# Altium PCB e80m.PcbDoc
Units mm, origin at the board's own origin, x right, y up, seen from the top; angles counter-clockwise.
Board outline 50 x 57 mm, 2 copper layers (Top Layer, Bottom Layer); 17 components, 19 nets, 77 pads, 100 vias.
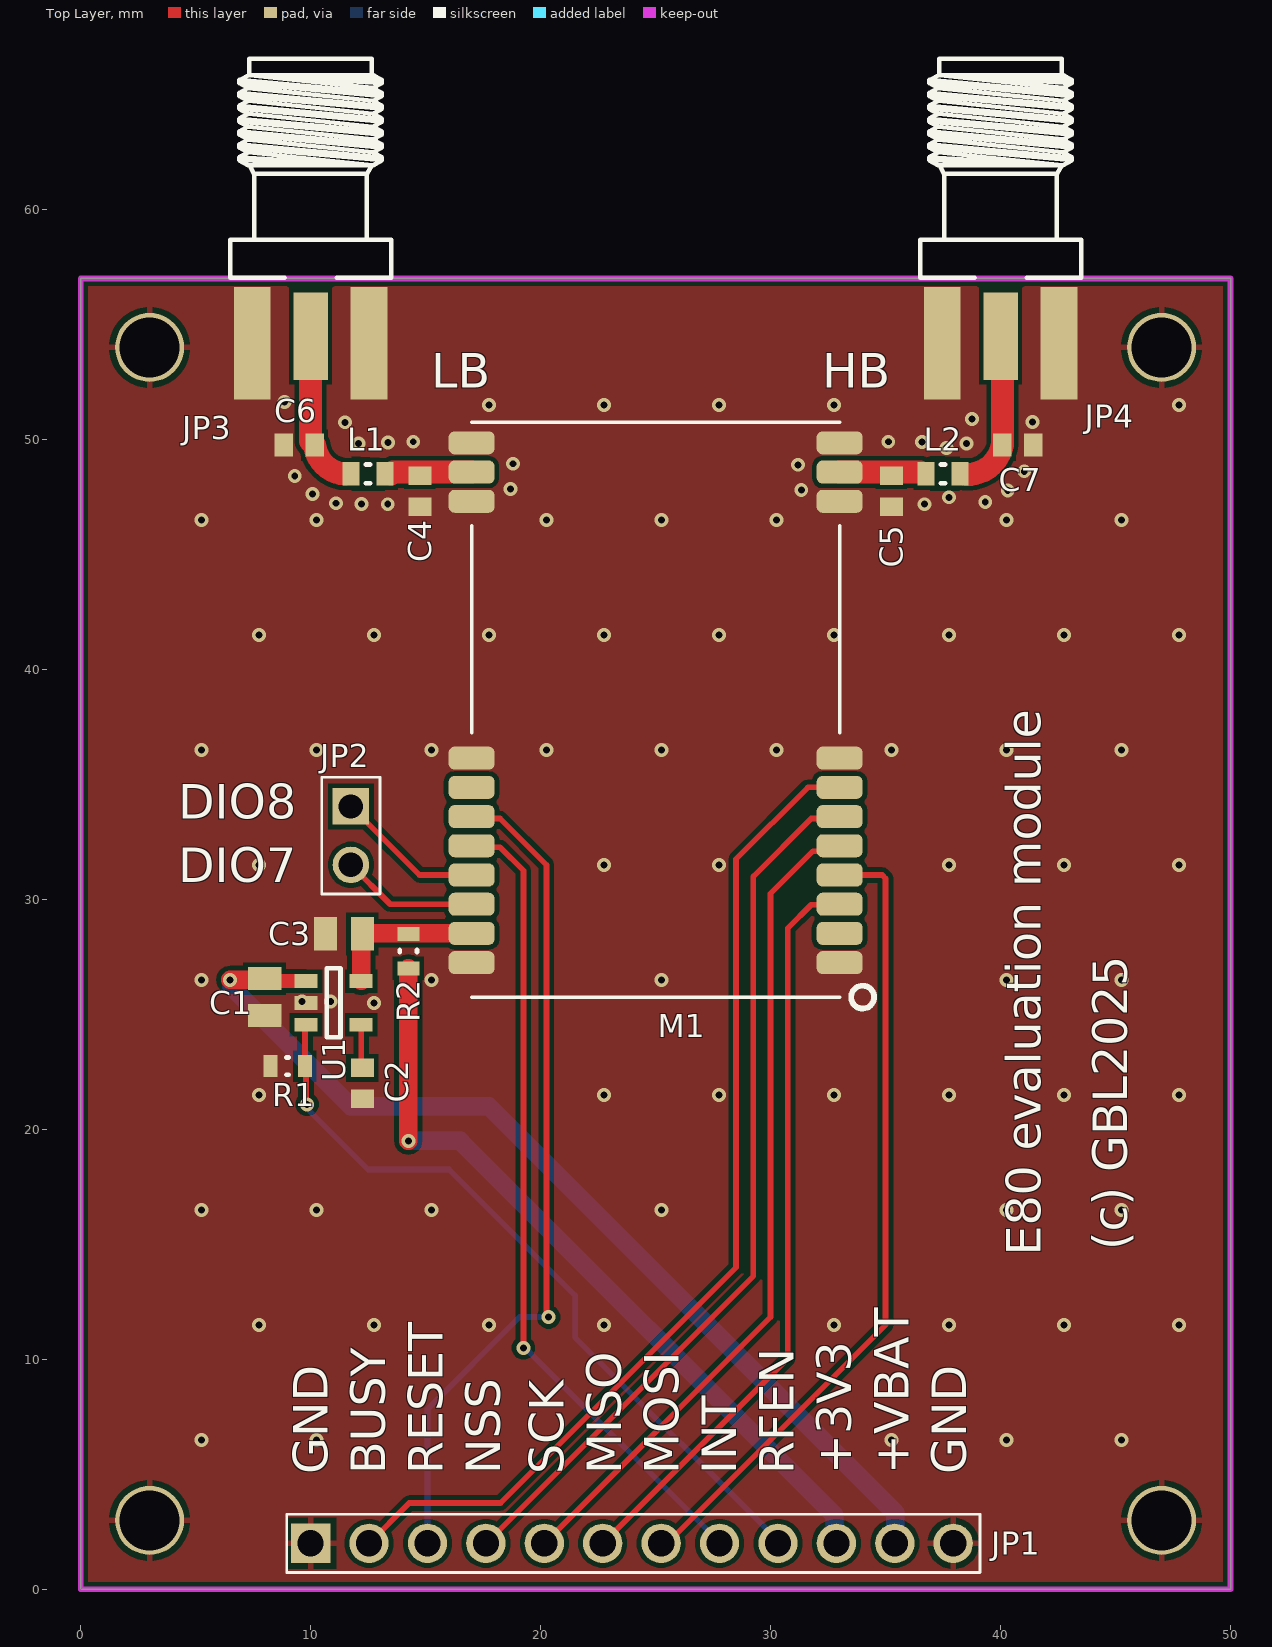
[diagram p0: Top Layer view]
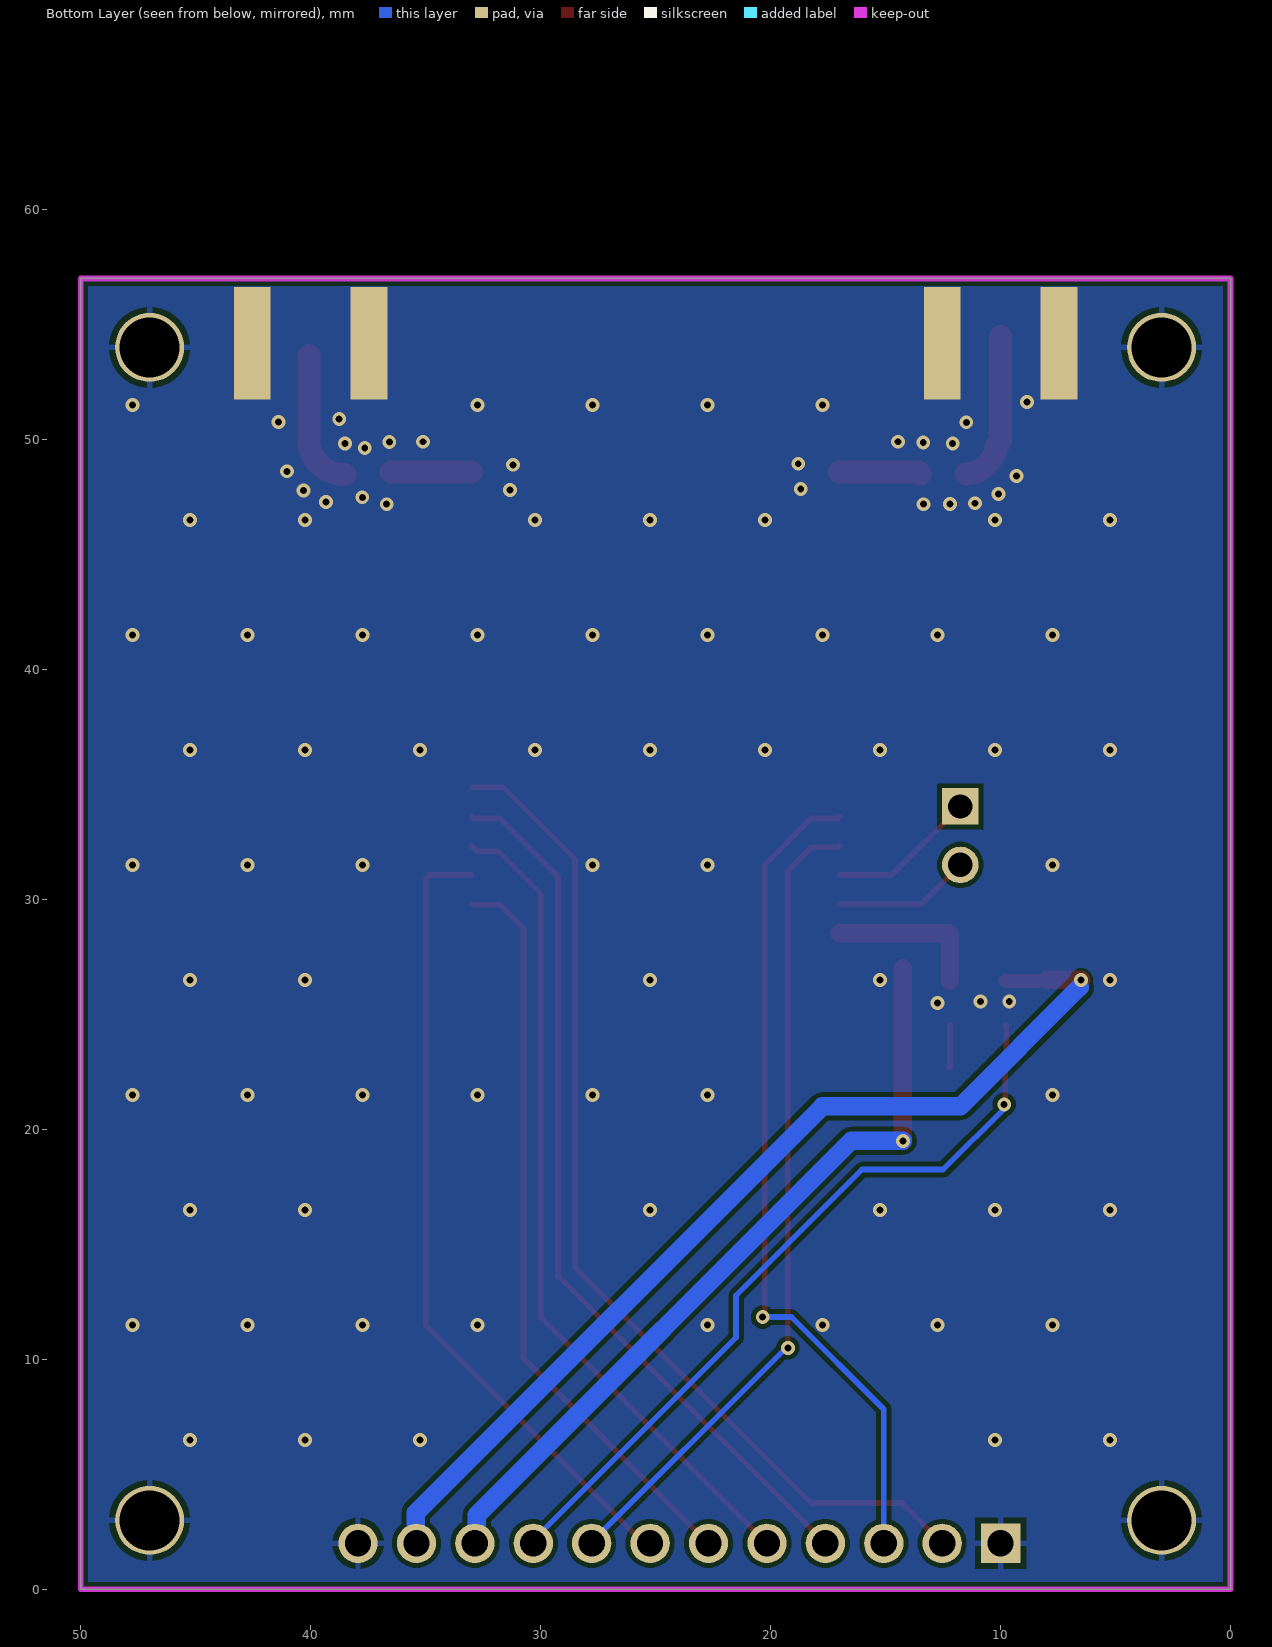
[diagram p1: Bottom Layer view, seen from below]
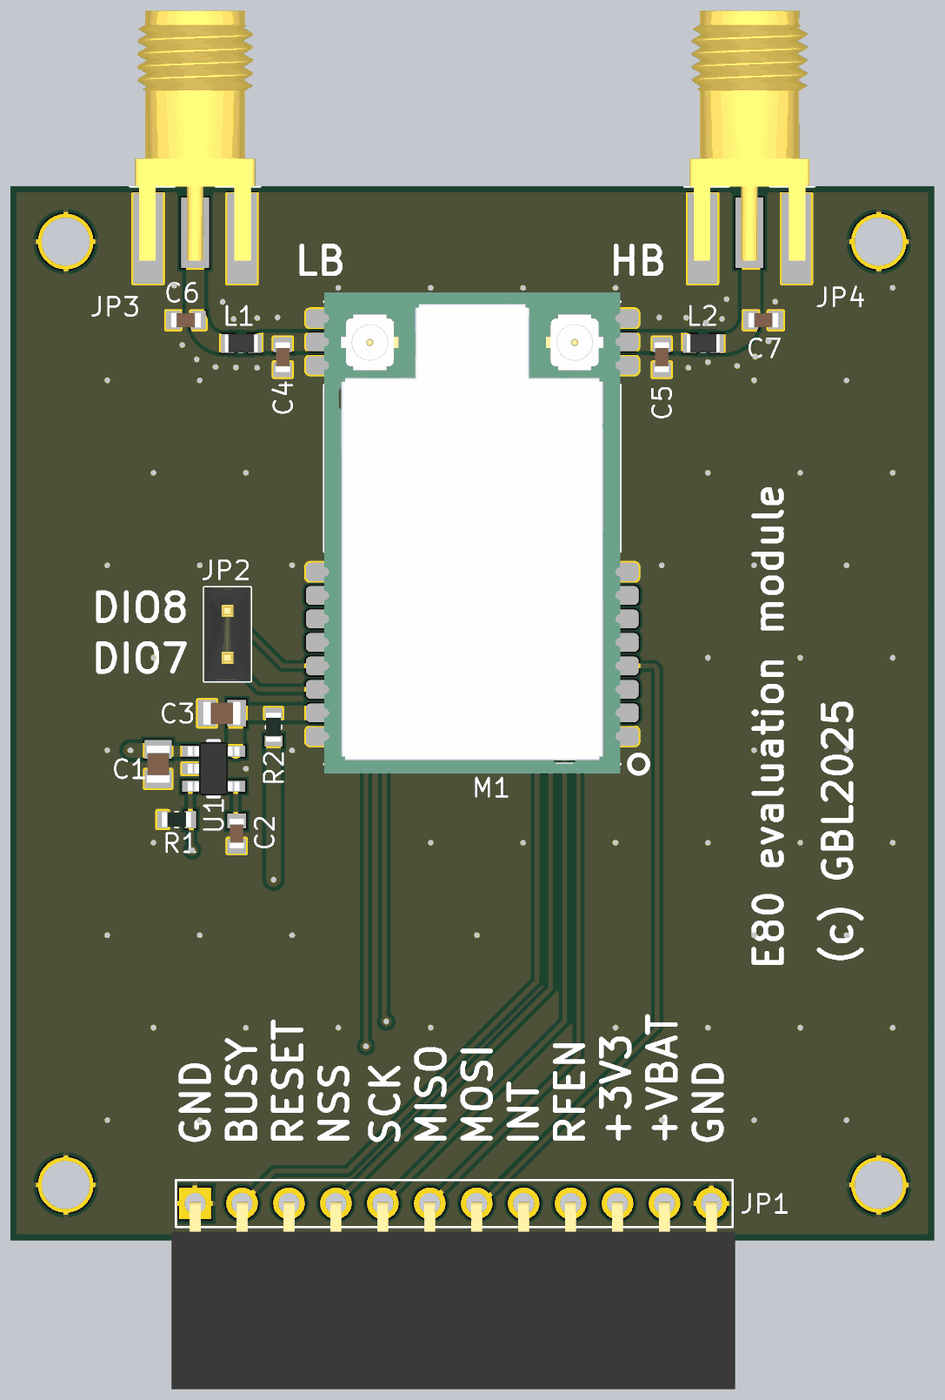
[diagram p2: 3D render of the assembled board from above, using the file's embedded part models]

## Layer stack, top to bottom
Top Solder: solder mask 0.0102, Solder Resist, Dk 3.5
Top Layer: signal copper 0.0356
Dielectric 1: dielectric 0.32, FR-4, Dk 4.8
Bottom Layer: signal copper 0.0356
Bottom Solder: solder mask 0.0102, Solder Resist, Dk 3.5

## Board outline
0,0 50,0 50,57 0,57

## Design rules (kind name [scope] priority, off if disabled: settings)
Clearance [All] p1: gap=0.2 ignorepadtopadclearanceinfootprint=FALSE
HoleSize [All] p1: absolutevalues=TRUE maxlimit=5 minlimit=0.025 maxpercent=80.000 minpercent=20.000
MinimumSolderMaskSliver [All] p1: minsoldermaskwidth=0
PolygonConnect PolygonConnect_1 [All vs IsNamedPolygon('GND_L01_P000') Or IsNamedPolygon('GND_L02_P001')] p1: thpad.connectstyle=Relief thpad.reliefconductorwidth=0.254 thpad.reliefentries=4 thpad.polygonreliefangle="90 Angle" thpad.airgapwidth=0.254 smdpad.connectstyle=Direct smdpad.reliefconductorwidth=0.254 smdpad.reliefentries=4 smdpad.polygonreliefangle="90 Angle" smdpad.airgapwidth=0.254 via.connectstyle=Direct via.reliefconductorwidth=0.254 via.reliefentries=4 via.polygonreliefangle="90 Angle" via.airgapwidth=0.254
PolygonConnect [All] p2: connectstyle=Relief reliefconductorwidth=0.254 reliefentries=4 polygonreliefangle="90 Angle" airgapwidth=0.254
RoutingVias [All] p1: holewidth=0.711 width=1.27 viastyle="Through Hole" minholewidth=0.711 minwidth=1.27 maxholewidth=0.711 maxwidth=1.27
SilkToSilkClearance [All] p1: silktosilkclearance=0.1
SilkToSolderMaskClearance [IsPad] p1: minsilkscreentomaskgap=0.1 clearancetoexposedcopper=TRUE
SolderMaskExpansion [All] p1: expansion=0.102 istentingtop=FALSE
Width [All] p1: maxlimit=2 minlimit=0.2 preferedwidth=0.25
26 further rules are at their usual default settings.

## Components (designator, comment, footprint, x,y, rotation, side; value= is the part's Value field where it differs from the comment)
C1 "CAPN" C-0805 8,25.75 r270 top
C2 "CAPN" C-0603 12.25,22 r270 top
C3 "CAPN" C-0805 11.45,28.5 r180 top
C4 "CAPN" C-0603 14.75,47.75 r270 top
C5 "CAPN" C-0603 35.25,47.75 r270 top
C6 "CAPN" C-0603 9.5,49.75 r180 top
C7 "CAPN" C-0603 40.75,49.75 r0 top
JP1 "CON12" PBS1-12R 10,2 r0 top locked
JP2 "HEADER 2" PLS1-2 11.75,34.04 r270 top
JP3 "EM-SA071-GGT" SMA_F_EDGE 10,55.75 r270 top
JP4 "EM-SA071-GGT" SMA_F_EDGE 40,55.75 r270 top
L1 "L" L-0603 12.5,48.5 r180 top
L2 "L" L-0603 37.5,48.5 r0 top
M1 "E80-400M2213S" E80 25,38.25 r180 top
R1 "RES" R-0603 9,22.75 r0 top
R2 "RES" R-0603 14.25,27.75 r270 top
U1 "LP5907MFX-3.0" SOT-23-5 11,25.5 r0 top

## Footprints (in the part's own frame and the unit in brackets; to place one, negate y for a bottom-side part, rotate by r counter-clockwise, add the part's x,y. Pads: shape width x height; smd on the part's side, far side on the other; paste and mask are expansions set on the pad)
C-0603 [mm] "Chip Capacitor, 2-Leads, Body 1,60x0,80mm, IPC Medium Density"
  rect 0.8x1 smd: 1(-0.675,0) 2(0.675,0)
  body extent -0.8,-0.4 0.8,0.4, height 0.8
C-0805 [mm] "Chip Capacitor, 2-Leads, Body 2,00x1,25mm, IPC Medium Density"
  rect 1x1.45 smd: 1(-0.8,0) 2(0.8,0)
  body extent -1,-0.62 1,0.63, height 1.25
E80 [mm]
  rrect50% 2x1 smd: 1(-8,11) 2(-8,9.73) 3(-8,8.46) 4(-8,7.19) 5(-8,5.92) 6(-8,4.65) 7(-8,3.38) 8(-8,2.11) 11(-8,-9.06) 12(-8,-10.33) 13(-8,-11.6) 14(8,-11.6) 15(8,-10.33) 16(8,-9.06) 19(8,2.11) 20(8,3.38) 21(8,4.65) 22(8,5.92) 23(8,7.19) 24(8,8.46) 25(8,9.73) 26(8,11)
  silkscreen extent -9.5,-12.5 8,13, body extent -8,-13 8,13, height 2.85
L-0603 [mm] "Chip Inductor, 2-Leads, Body 1,60x0,80mm, IPC Medium Density"
  rect 0.74x1.02 smd: 1(-0.735,0) 2(0.735,0)
  silkscreen extent -0.1,-0.41 0.1,0.41, body extent -0.9,-0.5 0.9,0.5, height 1
PBS1-12R [mm] "Header, Vertical, 2.54 mm pitch; 0.70 mm lead width, 10 pins, 1 row, 10 pins per row, 24.13 mm L X 2.54 mm W X 7.54 mm H body"
  rect 1.71x1.71 hole 1.14 paste-1.71: 1(0,0)
  round 1.71 hole 1.14 paste-1.71: 2(2.54,0) 3(5.08,0) 4(7.62,0) 5(10.16,0) 6(12.7,0) 7(15.24,0) 8(17.78,0) 9(20.32,0) 10(22.86,0) 11(25.4,0) 12(27.94,0)
  silkscreen extent -1.04,-1.27 29.1,1.27, body extent -1.27,-10.03 29.21,0.1, height 2.54
PLS1-2 [mm] "Header, Vertical, 2.54 mm pitch; 0.64 mm lead width, 2 pins, 1 row, 2 pins per row, 5.08 mm L X 2.54 mm W X 8.54 mm H body"
  rect 1.59x1.59 hole 1.06 paste-1.59: 1(0,0)
  round 1.59 hole 1.06 paste-1.59: 2(2.54,0)
  silkscreen extent -1.27,-1.27 3.81,1.27, body extent -1.27,-1.27 3.81,1.27, height 8.54
R-0603 [mm] "Chip Resistor, 2-Leads, Body 1,60x0,82mm, IPC Medium Density"
  rect 0.6x0.95 smd: 1(-0.75,0) 2(0.75,0)
  silkscreen extent -0.05,-0.38 0.05,0.38, body extent -0.8,-0.4 0.8,0.4, height 0.45
SMA_F_EDGE [mm] "SMA End Launch Jack for 1.58mm PCB, 50 Ohm, Flat Tab Contact"
  rect 3.81x1.5 smd: 1(1.27,0)
  rect 4.9x1.6 smd: 2(1.575,2.54) 2(1.575,-2.54)
  rect 4.9x1.6 smd far side: 2(1.575,2.54) 2(1.575,-2.54)
  silkscreen extent -10.81,-3.5 -1.28,3.5, body extent -10.73,-3.25 2.77,3.25, height 3.7
SOT-23-5 [mm] "SOT23, 5-Leads, Body 2,90x2,45mm, Pitch 0,95mm, IPC Medium Density"
  rect 1x0.6 smd: 1(-1.2,0.95) 2(-1.2,0) 3(-1.2,-0.95) 4(1.2,-0.95) 5(1.2,0.95)
  silkscreen extent -0.3,-1.5 0.3,1.5, body extent -1.4,-1.45 1.4,1.45, height 1.55

## Part data
C1 C2 C3 C4 C5 C6 C7: Voltage=50V, Вид=Конденсатор, Точність/група=NP0
JP1: "Connector", Вид=Роз'єм
JP3 JP4: library part SMA, "SMA Female R/A PCB Mount", Вид=Роз'єм
M1: library part E80
U1: library part LP5907, "250mA Low-Dropout Regulator", Вид=Мікросхема
JP2: Вид=Роз'єм
L1 L2: Вид=Індуктивність
R1 R2: Вид=Резистор, Точність/група=5%

## Free pads (board coordinates)
  round 3 hole 2.6: 1(3,3) 1(3,54) 1(47,3) 1(47,54)

## Via types
v1: diameter 0.6, hole 0.3, Top Layer to Bottom Layer, tented both sides, 100 vias

## Nets (pads, with @x,y where several pads share a name; then routed paths per layer and width w, separated by ;. In a path a pad name is that pad's centre, name@x,y a point inside that pad or via, vN(x,y) a via of type N, cw(c..) or ccw(c..) an arc to the next point about the centre after c; other vN are vias at no path point)
GND: C1.2 C2.2 C3.2 C4.2 C5.2 C6.2 C7.2 JP1.1 JP1.12 JP3.2 JP4.2 M1.1 M1.8 M1.11 M1.13 M1.14 M1.16 M1.19 M1.26 pad.1 R1.1 U1.2
  other v1: 5.25,6.5 10.25,6.5 35.25,6.5 40.25,6.5 45.25,6.5 7.75,11.5 12.75,11.5 17.75,11.5 22.75,11.5 32.75,11.5 37.75,11.5 42.75,11.5 47.75,11.5 5.25,16.5 10.25,16.5 15.25,16.5 25.25,16.5 40.25,16.5 45.25,16.5 7.75,21.5 22.75,21.5 27.75,21.5 32.75,21.5 37.75,21.5 42.75,21.5 47.75,21.5 12.75,25.5 9.625,25.557 10.875,25.557 5.25,26.5 15.25,26.5 25.25,26.5 40.25,26.5 45.25,26.5 7.75,31.5 22.75,31.5 27.75,31.5 37.75,31.5 42.75,31.5 47.75,31.5 5.25,36.5 10.25,36.5 15.25,36.5 20.25,36.5 25.25,36.5 30.25,36.5 35.25,36.5 40.25,36.5 45.25,36.5 7.75,41.5 12.75,41.5 17.75,41.5 22.75,41.5 27.75,41.5 32.75,41.5 37.75,41.5 42.75,41.5 47.75,41.5 5.25,46.5 10.25,46.5 20.25,46.5 25.25,46.5 30.25,46.5 40.25,46.5 45.25,46.5 12.207,47.193 13.354,47.183 36.695,47.183 11.107,47.222 39.33,47.278 37.754,47.482 10.087,47.632 40.309,47.78 31.335,47.802 18.689,47.845 9.309,48.409 41.029,48.612 31.197,48.893 18.799,48.94 37.647,49.625 12.085,49.817 38.511,49.817 13.362,49.869 36.578,49.886 14.462,49.897 35.118,49.897 11.492,50.743 41.392,50.754 38.758,50.889 17.75,51.5 22.75,51.5 27.75,51.5 32.75,51.5 47.75,51.5 8.858,51.629
MISO: JP1.6 M1.3 | length 32.8
  Top Layer w0.25: JP1.6 30.75,10.05 30.75,28.75 31.768,29.768 32.978,29.768 M1.3
MOSI: JP1.7 M1.4 | length 35.2
  Top Layer w0.25: JP1.7 25.5,2 35,11.5 35,30.911 34.851,31.06 M1.4
NetC2_1: C2.1 U1.4 | length 1.9
  Top Layer w0.25: U1.4 12.2,22.725 C2.1
NetC3_1: C3.1 M1.25 R2.1 U1.5 | length 7.3
  Top Layer w0.25: C3.1@12.2,28.45 C3.1 C3.1@12.27,28.52 ; R2.1@13.875,28.45 14.075,28.25 R2.1@14.25,28.25
  Top Layer w0.8: U1.5 C3.1@12.2,28.45 ; C3.1@12.27,28.52 M1.25
NetC4_1: C4.1 L1.1 M1.15 | length 3.8
  Top Layer w0.25: L1.1 L1.1@13.5,48.5
  Top Layer w1: L1.1@13.5,48.5 13.58,48.58 M1.15
NetC5_1: C5.1 L2.1 M1.12 | length 3.5
  Top Layer w1: M1.12 L2.1@36.5,48.58
NetC6_1: C6.1 JP3.1 L1.2 | length 6.8
  Top Layer w1: JP3.1 10,49.925 C6.1 ccw(c11.595,49.92) L1.2@11.5,48.493
NetC7_1: C7.1 JP4.1 L2.2 | length 6.2
  Top Layer w0.25: JP4.1@40,53.73 JP4.1@40.075,53.655
  Top Layer w1: L2.2@38.499,48.472 ccw(c38.53,50.045) C7.1 JP4.1@40.075,53.655
NetJP2_1: JP2.1 M1.23 | length 6.5
  Top Layer w0.25: JP2.1 14.73,31.06 M1.23
NetJP2_2: JP2.2 M1.24 | length 6
  Top Layer w0.25: JP2.2 13.46,29.79 M1.24
RF_BUSY: JP1.2 M1.7 | length 44.5
  Top Layer w0.25: JP1.2 14.29,3.75 18.25,3.75 28.5,14 28.5,31.75 31.62,34.87 M1.7
RF_CS: JP1.4 M1.6 | length 38.6
  Top Layer w0.25: JP1.4 29.25,13.63 29.25,31 31.768,33.518 32.918,33.518 M1.6
RF_EN: JP1.9 R1.2 U1.3 | length 33.5
  Top Layer w0.25: U1.3 9.75,24.5 R1.2 9.798,22.702 9.798,21.136 v1(9.846,21.088)
  Bottom Layer w0.25: v1@9.75,21 12.5,18.25 16.022,18.25 21.5,12.772 21.5,10.95 JP1.9@30.7,1.75
RF_INT: JP1.8 M1.22 | length 36
  Top Layer w0.25: M1.22 17.062,32.268 18.232,32.268 19.25,31.25 v1(19.25,10.5)
  Bottom Layer w0.25: v1(19.25,10.5) 19.33,10.5 28.08,1.75 JP1.8@28.16,1.75
RF_RST: JP1.3 M1.21 | length 36.6
  Top Layer w0.25: M1.21 17.082,33.518 18.232,33.518 20.25,31.5 v1@20.25,11.75
  Bottom Layer w0.25: JP1.3 15.08,7.83 19.088,11.838 v1(20.346,11.838)
SCK: JP1.5 M1.5 | length 36.2
  Top Layer w0.25: JP1.5 30,11.84 30,30.25 31.848,32.098 32.768,32.098 M1.5
V_BATT: C1.1 JP1.11 U1.1 | length 43.7
  Top Layer w0.25: C1.1@7.95,26.5 C1.1 C1.1@8.1,26.45
  Top Layer w0.6: C1.1@8.1,26.45 U1.1
  Top Layer w0.8: v1(6.5,26.5) C1.1@7.95,26.5
  Bottom Layer w0.25: v1(6.5,26.5) 6.566,26.434 6.566,26.184
  Bottom Layer w0.8: 6.566,26.184 11.75,21 17.75,21 35.422,3.328 35.422,2.108 JP1.11@35.737,1.793
VCC: JP1.10 R2.2 | length 34
  Top Layer w0.8: v1(14.25,19.5) R2.2
  Bottom Layer w0.8: v1(14.25,19.5) 16.5,19.5 32.777,3.223 32.777,2.083 JP1.10
pads on no net: M1.2 M1.20

## Polygon pours and split planes (outlines as drawn)
GND on Top Layer "GND_L01_P000" (solid, remove dead copper, pour order 0): 0,0 50,0 50,57 0,57
GND on Bottom Layer "GND_L02_P001" (solid, remove dead copper, pour order 1): 0,0 50,0 50,57 0,57

## Keep-outs
Keep-Out Layer:
  the board outline again, w0.25

## Other copper
Top Layer:
  pour cut-out: 36.92,49.286 36.92,47.75 38.196,47.75 38.25,47.804 38.25,49.25
  pour cut-out: 11.765,49.259 11.765,47.75 13.235,47.75 13.235,49.201

## Silkscreen, mask and mechanical layers (free items; w line width, h text height)
Top Overlay:
  text "LB" at 15.254,52.254 h1.5
  text "HB" at 32.254,52.254 h1.5
  text "DIO8" at 4.254,33.504 h1.5
  text "DIO7" at 4.254,30.754 h1.5
  text "(c) GBL2025" at 45.496,14.754 h1.5 r90
  text "E80 evaluation module" at 41.746,14.504 h1.5 r90
  text "GND" at 10.746,5.004 h1.5 r90
  text "BUSY" at 13.246,5.004 h1.5 r90
  text "RESET" at 15.746,5.004 h1.5 r90
  text "NSS" at 18.246,5.004 h1.5 r90
  text "SCK" at 20.996,5.004 h1.5 r90
  text "MISO" at 23.496,5.004 h1.5 r90
  text "MOSI" at 25.996,5.004 h1.5 r90
  text "INT" at 28.496,5.004 h1.5 r90
  text "RFEN" at 30.996,5.004 h1.5 r90
  text "+3V3" at 33.496,5.004 h1.5 r90
  text "+VBAT" at 35.996,5.004 h1.5 r90
  text "GND" at 38.496,5.004 h1.5 r90